# Altium PCB PCB2.PcbDoc (part 2 of 2)
Units mm, origin at the board's own origin, x right, y up, seen from the top; angles counter-clockwise.
Board outline 97.92 x 101.35 mm, 2 copper layers (Top Layer, Bottom Layer); 189 components, 25 nets, 488 pads, 0 vias.
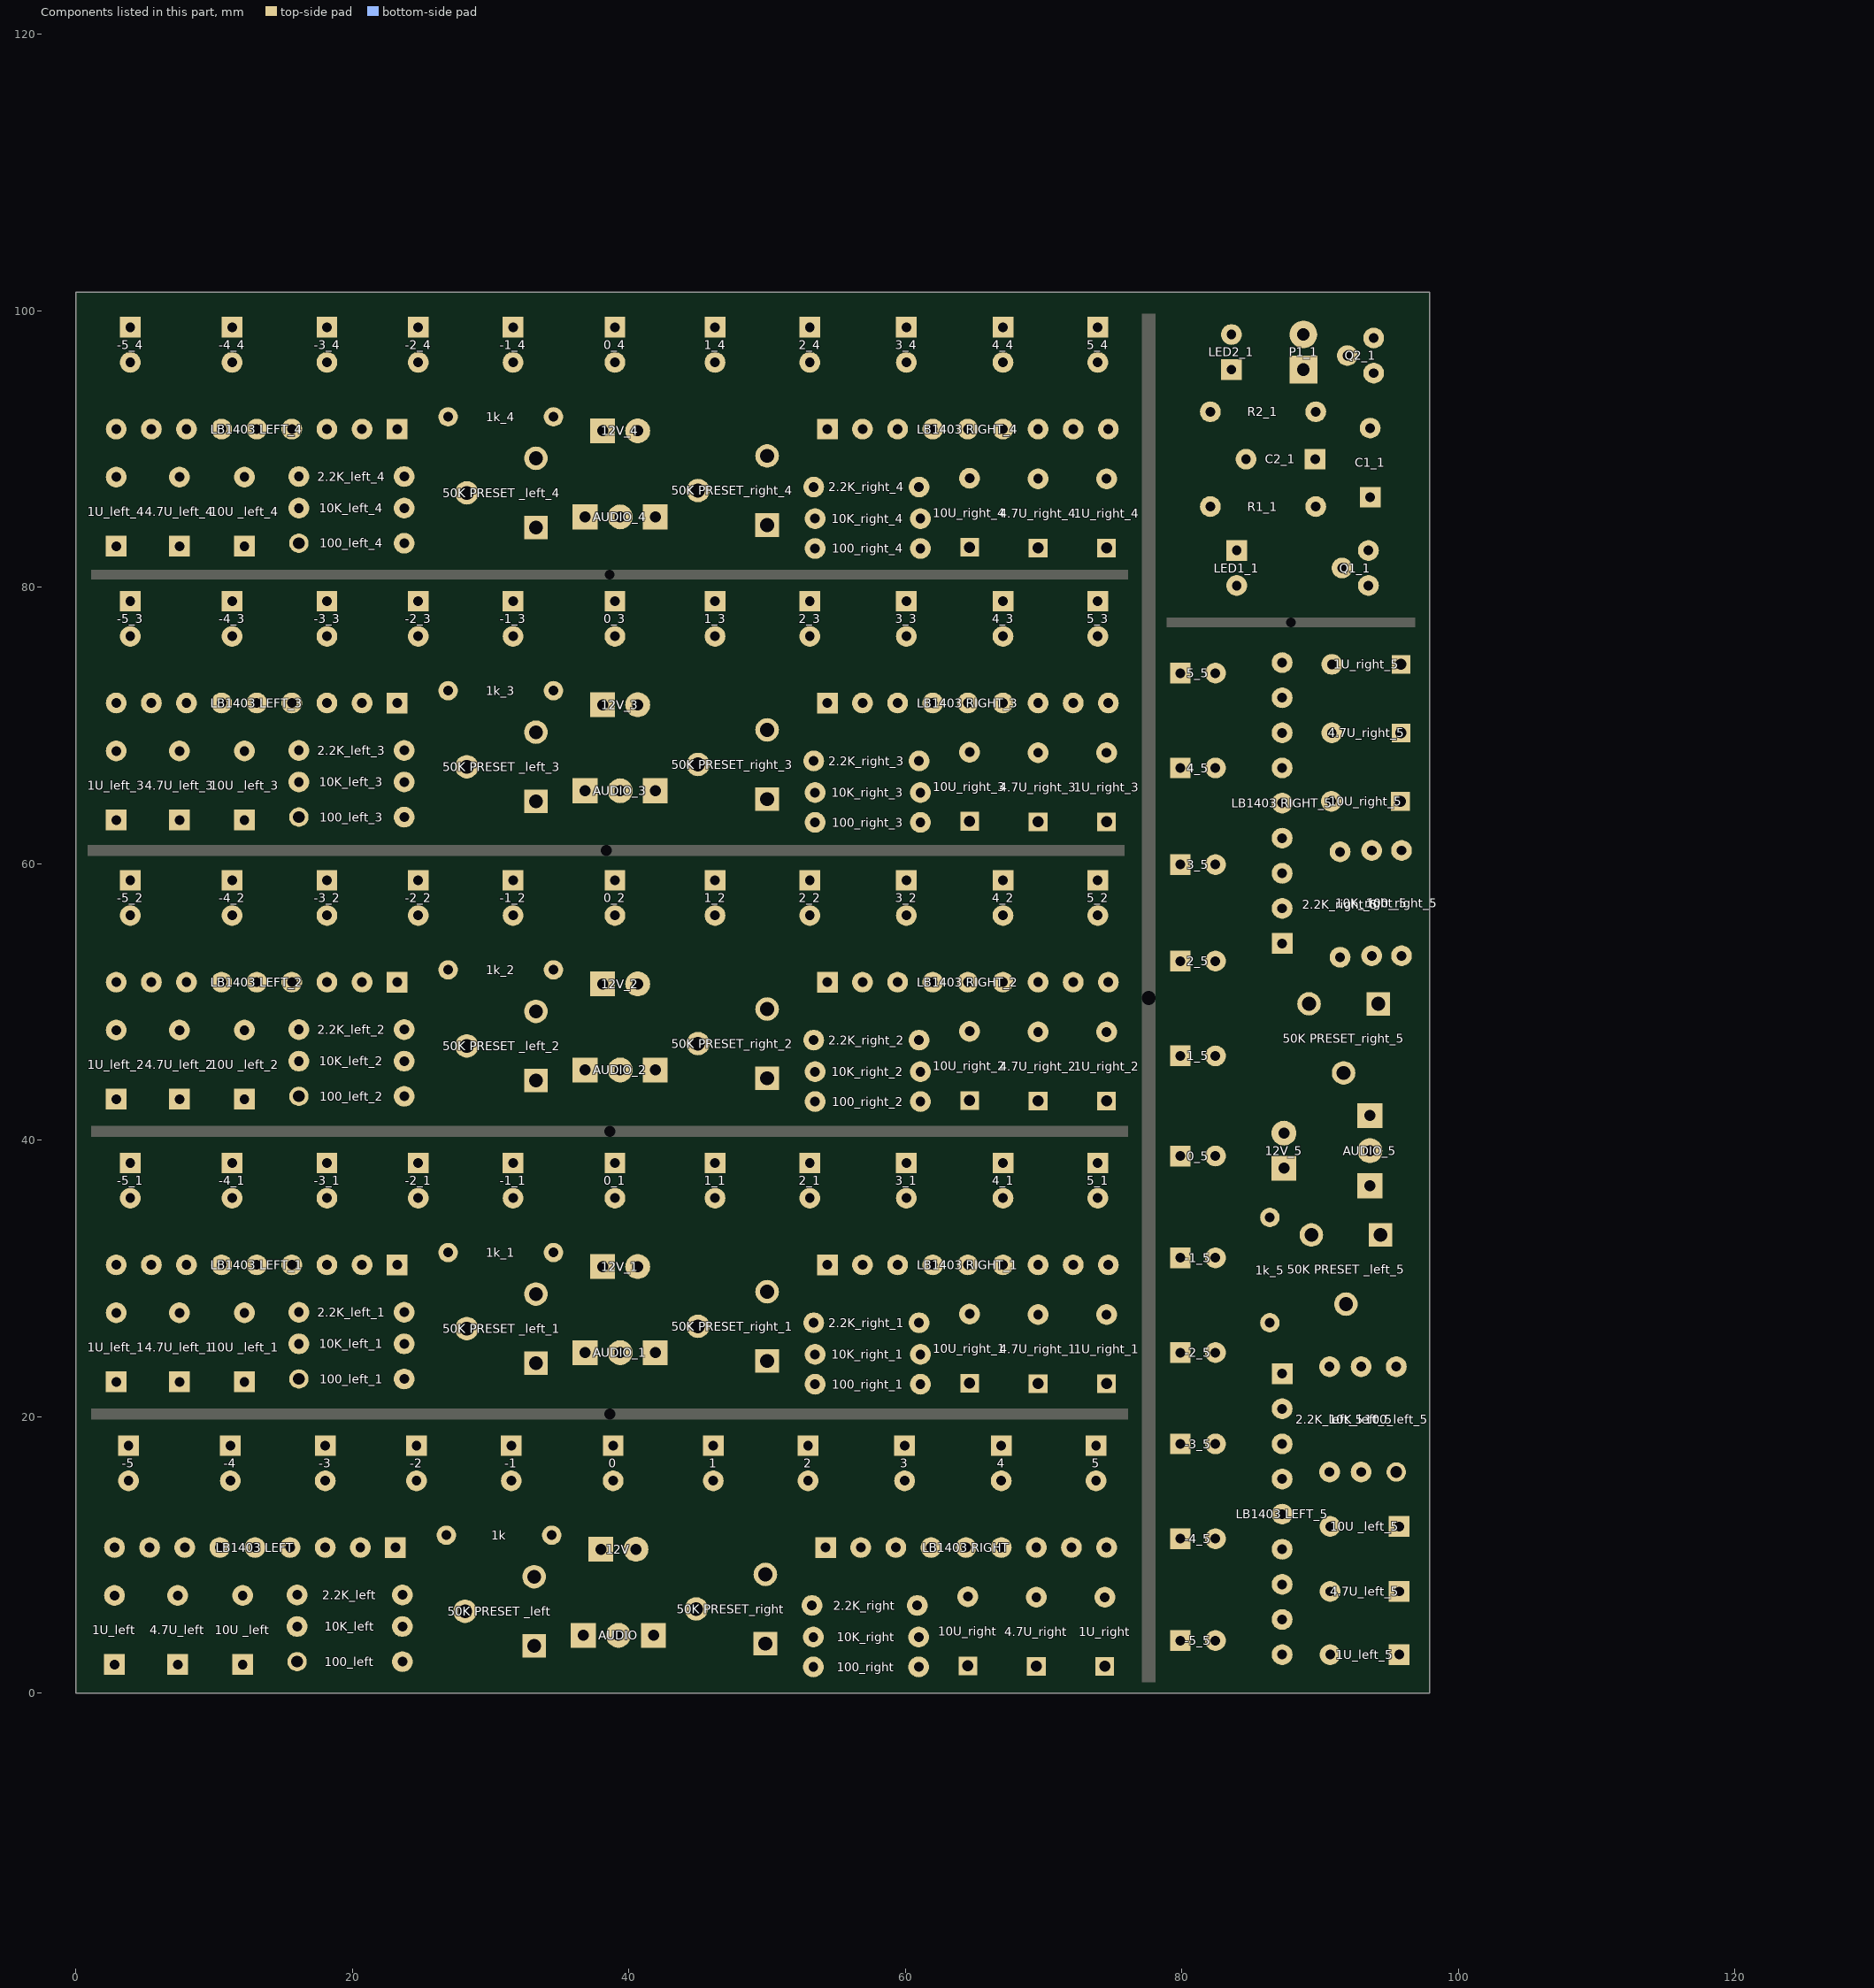
[diagram p2: the components of this part, seen from the top]

## Nets (pads, with @x,y where several pads share a name; then routed paths per layer and width w, separated by ;. In a path a pad name is that pad's centre, name@x,y a point inside that pad or via, vN(x,y) a via of type N, cw(c..) or ccw(c..) an arc to the next point about the centre after c; other vN are vias at no path point) (continued)
copper on no net: | length 3008.6
  Top Layer w0.508: 2.921,30.988 2.565,31.344 2.565,36.982 3.937,38.354 ; 2.921,51.435 2.565,51.791 2.565,57.429 3.937,58.801 ; 2.921,71.628 2.565,71.984 2.565,77.622 3.937,78.994 ; 2.921,91.44 2.565,91.796 2.565,97.434 3.937,98.806 ; 5.461,30.988 5.461,35.814 9.271,39.624 26.289,39.624 28.575,37.338 28.575,26.677 28.274,26.376 ; 5.461,51.435 5.461,56.261 9.271,60.071 26.289,60.071 28.575,57.785 28.575,47.124 28.274,46.823 ; 5.461,71.628 5.461,76.454 9.271,80.264 26.289,80.264 28.575,77.978 28.575,67.317 28.274,67.016 ; 5.461,91.44 5.461,96.266 9.271,100.076 26.289,100.076 28.575,97.79 28.575,87.129 28.274,86.828 ; 7.493,22.519 8.865,23.891 8.865,30.124 8.001,30.988 ; 7.493,42.966 8.865,44.338 8.865,50.571 8.001,51.435 ; 7.493,63.159 8.865,64.531 8.865,70.764 8.001,71.628 ; 7.493,82.971 8.865,84.343 8.865,90.576 8.001,91.44 ; 11.303,38.354 12.573,37.084 12.573,34.163 11.811,33.401 11.811,29.693 10.922,28.804 10.922,23.789 12.192,22.519 ; 11.303,58.801 12.573,57.531 12.573,54.61 11.811,53.848 11.811,50.14 10.922,49.251 10.922,44.236 12.192,42.966 ; 11.303,78.994 12.573,77.724 12.573,74.803 11.811,74.041 11.811,70.333 10.922,69.444 10.922,64.429 12.192,63.159 ; 11.303,98.806 12.573,97.536 12.573,94.615 11.811,93.853 11.811,90.145 10.922,89.256 10.922,84.241 12.192,82.971 ; 12.192,27.519 13.081,28.408 13.081,30.988 ; 12.192,47.966 13.081,48.855 13.081,51.435 ; 12.192,68.159 13.081,69.048 13.081,71.628 ; 12.192,87.971 13.081,88.86 13.081,91.44 ; 18.161,30.988 18.161,35.814 ; 18.161,51.435 18.161,56.261 ; 18.161,71.628 18.161,76.454 ; 18.161,91.44 18.161,96.266 ; 20.701,30.988 20.701,31.75 24.765,35.814 ; 20.701,51.435 20.701,52.197 24.765,56.261 ; 20.701,71.628 20.701,72.39 24.765,76.454 ; 20.701,91.44 20.701,92.202 24.765,96.266 ; 23.749,22.733 24.409,22.073 33.909,22.073 34.671,22.835 34.671,27.432 35.408,28.169 ; 23.749,27.559 26.314,24.994 29.392,24.994 33.274,28.876 ; 23.749,43.18 24.409,42.52 33.909,42.52 34.671,43.282 34.671,47.879 35.408,48.616 ; 23.749,48.006 26.314,45.441 29.392,45.441 33.274,49.323 ; 23.749,63.373 24.409,62.713 33.909,62.713 34.671,63.475 34.671,68.072 35.408,68.809 ; 23.749,68.199 26.314,65.634 29.392,65.634 33.274,69.516 ; 23.749,83.185 24.409,82.525 33.909,82.525 34.671,83.287 34.671,87.884 35.408,88.621 ; 23.749,88.011 26.314,85.446 29.392,85.446 33.274,89.328 ; 24.765,38.354 26.924,36.195 26.924,31.877 ; 24.765,58.801 26.924,56.642 26.924,52.324 ; 24.765,78.994 26.924,76.835 26.924,72.517 ; 24.765,98.806 26.924,96.647 26.924,92.329 ; 34.544,31.877 34.544,33.909 38.989,38.354 ; 34.544,52.324 34.544,54.356 38.989,58.801 ; 34.544,72.517 34.544,74.549 38.989,78.994 ; 34.544,92.329 34.544,94.361 38.989,98.806 ; 38.1,30.861 35.408,28.169 ; 38.1,51.308 35.408,48.616 ; 38.1,71.501 35.408,68.809 ; 38.1,91.313 35.408,88.621 ; 38.989,35.814 38.989,32.512 40.64,30.861 40.64,25.908 39.37,24.638 ; 38.989,56.261 38.989,52.959 40.64,51.308 40.64,46.355 39.37,45.085 ; 38.989,76.454 38.989,73.152 40.64,71.501 40.64,66.548 39.37,65.278 ; 38.989,96.266 38.989,92.964 40.64,91.313 40.64,86.36 39.37,85.09 ; 46.228,35.814 49.53,35.814 54.356,30.988 ; 46.228,56.261 49.53,56.261 54.356,51.435 ; 46.228,76.454 49.53,76.454 54.356,71.628 ; 46.228,96.266 49.53,96.266 54.356,91.44 ; 53.086,35.814 56.896,32.004 56.896,30.988 ; 53.086,56.261 56.896,52.451 56.896,51.435 ; 53.086,76.454 56.896,72.644 56.896,71.628 ; 53.086,96.266 56.896,92.456 56.896,91.44 ; 53.467,22.352 36.449,22.352 35.408,23.393 35.408,28.169 ; 53.467,42.799 36.449,42.799 35.408,43.84 35.408,48.616 ; 53.467,62.992 36.449,62.992 35.408,64.033 35.408,68.809 ; 53.467,82.804 36.449,82.804 35.408,83.845 35.408,88.621 ; 59.436,30.988 59.436,35.179 60.071,35.814 ; 59.436,51.435 59.436,55.626 60.071,56.261 ; 59.436,71.628 59.436,75.819 60.071,76.454 ; 59.436,91.44 59.436,95.631 60.071,96.266 ; 60.071,38.354 61.341,37.084 61.341,32.766 60.706,32.131 60.706,28.905 59.715,27.915 59.715,23.724 61.087,22.352 ; 60.071,58.801 61.341,57.531 61.341,53.213 60.706,52.578 60.706,49.352 59.715,48.362 59.715,44.171 61.087,42.799 ; 60.071,78.994 61.341,77.724 61.341,73.406 60.706,72.771 60.706,69.545 59.715,68.555 59.715,64.364 61.087,62.992 ; 60.071,98.806 61.341,97.536 61.341,93.218 60.706,92.583 60.706,89.357 59.715,88.367 59.715,84.176 61.087,82.804 ; 61.976,30.988 62.611,31.623 62.865,31.623 67.056,35.814 ; 61.976,51.435 62.611,52.07 62.865,52.07 67.056,56.261 ; 61.976,71.628 62.611,72.263 62.865,72.263 67.056,76.454 ; 61.976,91.44 62.611,92.075 62.865,92.075 67.056,96.266 ; 64.516,30.988 64.516,29.261 64.643,29.134 64.643,27.432 ; 64.516,51.435 64.516,49.708 64.643,49.581 64.643,47.879 ; 64.516,71.628 64.516,69.901 64.643,69.774 64.643,68.072 ; 64.516,91.44 64.516,89.713 64.643,89.586 64.643,87.884 ; 69.596,22.392 70.866,23.662 70.866,29.718 69.596,30.988 ; 69.596,42.839 70.866,44.109 70.866,50.165 69.596,51.435 ; 69.596,63.032 70.866,64.302 70.866,70.358 69.596,71.628 ; 69.596,82.844 70.866,84.114 70.866,90.17 69.596,91.44 ; 73.914,38.354 72.542,36.982 72.542,33.122 74.676,30.988 ; 73.914,58.801 72.542,57.429 72.542,53.569 74.676,51.435 ; 73.914,78.994 72.542,77.622 72.542,73.762 74.676,71.628 ; 73.914,98.806 72.542,97.434 72.542,93.574 74.676,91.44 ; 79.883,3.81 81.255,2.438 86.893,2.438 87.249,2.794 ; 79.883,11.176 81.153,12.446 84.074,12.446 84.836,11.684 88.544,11.684 89.433,10.795 94.448,10.795 95.718,12.065 ; 79.883,24.638 82.042,26.797 86.36,26.797 ; 79.883,38.862 84.328,34.417 86.36,34.417 ; 79.883,59.944 81.153,61.214 85.471,61.214 86.106,60.579 89.332,60.579 90.322,59.588 94.513,59.588 95.885,60.96 ; 79.883,73.787 81.255,72.415 85.115,72.415 87.249,74.549 ; 82.423,18.034 87.249,18.034 ; 82.423,24.638 86.487,20.574 87.249,20.574 ; 82.423,38.862 85.725,38.862 87.376,40.513 92.329,40.513 93.599,39.243 ; 82.423,46.101 82.423,49.403 87.249,54.229 ; 82.423,52.959 86.233,56.769 87.249,56.769 ; 82.423,59.944 83.058,59.309 87.249,59.309 ; 82.423,66.929 86.614,62.738 86.614,62.484 87.249,61.849 ; 87.249,5.334 82.423,5.334 78.613,9.144 78.613,26.162 80.899,28.448 91.56,28.448 91.861,28.147 ; 87.249,7.874 88.113,8.738 94.346,8.738 95.718,7.366 ; 87.249,12.954 89.829,12.954 90.718,12.065 ; 87.249,64.389 88.976,64.389 89.103,64.516 90.805,64.516 ; 87.249,69.469 88.519,70.739 94.575,70.739 95.845,69.469 ; 87.376,37.973 90.068,35.281 ; 89.361,33.147 93.243,29.265 93.243,26.187 90.678,23.622 ; 95.504,23.622 96.164,24.282 96.164,33.782 95.402,34.544 90.805,34.544 90.068,35.281 ; 95.885,53.34 95.885,36.322 94.844,35.281 90.068,35.281
  Top Layer w0.762: 89.638,89.265 89.638,90.114 93.869,94.345 93.869,95.488 ; 93.488,82.661 93.488,83.804 95.647,85.963 95.647,96.25 93.869,98.028
  Bottom Layer w0.508: 2.921,22.519 5.904,25.502 14.072,25.502 16.129,27.559 ; 2.921,27.519 4.981,29.579 30.467,29.579 35.408,24.638 36.83,24.638 ; 2.921,42.966 5.904,45.949 14.072,45.949 16.129,48.006 ; 2.921,47.966 4.981,50.026 30.467,50.026 35.408,45.085 36.83,45.085 ; 2.921,63.159 5.904,66.142 14.072,66.142 16.129,68.199 ; 2.921,68.159 4.981,70.219 30.467,70.219 35.408,65.278 36.83,65.278 ; 2.921,82.971 5.904,85.954 14.072,85.954 16.129,88.011 ; 2.921,87.971 4.981,90.031 30.467,90.031 35.408,85.09 36.83,85.09 ; 3.937,35.814 5.715,35.814 10.541,30.988 ; 3.937,38.354 11.303,38.354 18.161,38.354 24.765,38.354 31.623,38.354 ; 3.937,56.261 5.715,56.261 10.541,51.435 ; 3.937,58.801 11.303,58.801 18.161,58.801 24.765,58.801 31.623,58.801 ; 3.937,76.454 5.715,76.454 10.541,71.628 ; 3.937,78.994 11.303,78.994 18.161,78.994 24.765,78.994 31.623,78.994 ; 3.937,96.266 5.715,96.266 10.541,91.44 ; 3.937,98.806 11.303,98.806 18.161,98.806 24.765,98.806 31.623,98.806 ; 7.493,22.519 8.875,23.901 14.757,23.901 16.129,25.273 ; 7.493,27.519 12.192,27.519 13.49,28.817 20.205,28.817 23.749,25.273 26.314,27.838 29.312,27.838 33.274,23.876 34.315,23.876 34.976,23.216 37.948,23.216 39.37,24.638 40.792,23.216 43.764,23.216 44.592,24.043 49.998,24.043 51.486,24.043 51.954,24.511 53.467,24.511 57.023,28.067 64.008,28.067 64.643,27.432 67.081,27.432 67.121,27.392 69.596,27.392 ; 7.493,42.966 8.875,44.348 14.757,44.348 16.129,45.72 ; 7.493,47.966 12.192,47.966 13.49,49.264 20.205,49.264 23.749,45.72 26.314,48.285 29.312,48.285 33.274,44.323 34.315,44.323 34.976,43.663 37.948,43.663 39.37,45.085 40.792,43.663 43.764,43.663 44.592,44.49 49.998,44.49 51.486,44.49 51.954,44.958 53.467,44.958 57.023,48.514 64.008,48.514 64.643,47.879 67.081,47.879 67.121,47.839 69.596,47.839 ; 7.493,63.159 8.875,64.541 14.757,64.541 16.129,65.913 ; 7.493,68.159 12.192,68.159 13.49,69.457 20.205,69.457 23.749,65.913 26.314,68.478 29.312,68.478 33.274,64.516 34.315,64.516 34.976,63.856 37.948,63.856 39.37,65.278 40.792,63.856 43.764,63.856 44.592,64.683 49.998,64.683 51.486,64.683 51.954,65.151 53.467,65.151 57.023,68.707 64.008,68.707 64.643,68.072 67.081,68.072 67.121,68.032 69.596,68.032 ; 7.493,82.971 8.875,84.353 14.757,84.353 16.129,85.725 ; 7.493,87.971 12.192,87.971 13.49,89.269 20.205,89.269 23.749,85.725 26.314,88.29 29.312,88.29 33.274,84.328 34.315,84.328 34.976,83.668 37.948,83.668 39.37,85.09 40.792,83.668 43.764,83.668 44.592,84.495 49.998,84.495 51.486,84.495 51.954,84.963 53.467,84.963 57.023,88.519 64.008,88.519 64.643,87.884 67.081,87.884 67.121,87.844 69.596,87.844 ; 11.303,35.814 11.303,34.646 12.065,33.884 12.725,33.884 15.621,30.988 ; 11.303,56.261 11.303,55.093 12.065,54.331 12.725,54.331 15.621,51.435 ; 11.303,76.454 11.303,75.286 12.065,74.524 12.725,74.524 15.621,71.628 ; 11.303,96.266 11.303,95.098 12.065,94.336 12.725,94.336 15.621,91.44 ; 12.192,22.519 15.915,22.519 16.129,22.733 ; 12.192,42.966 15.915,42.966 16.129,43.18 ; 12.192,63.159 15.915,63.159 16.129,63.373 ; 12.192,82.971 15.915,82.971 16.129,83.185 ; 23.241,30.988 28.067,35.814 31.623,35.814 ; 23.241,51.435 28.067,56.261 31.623,56.261 ; 23.241,71.628 28.067,76.454 31.623,76.454 ; 23.241,91.44 28.067,96.266 31.623,96.266 ; 41.91,24.638 43.002,24.638 43.358,24.994 46.457,24.994 47.498,26.035 47.498,29.947 48.666,31.115 50.851,31.115 53.086,28.88 73.061,28.88 74.549,27.392 ; 41.91,45.085 43.002,45.085 43.358,45.441 46.457,45.441 47.498,46.482 47.498,50.394 48.666,51.562 50.851,51.562 53.086,49.327 73.061,49.327 74.549,47.839 ; 41.91,65.278 43.002,65.278 43.358,65.634 46.457,65.634 47.498,66.675 47.498,70.587 48.666,71.755 50.851,71.755 53.086,69.52 73.061,69.52 74.549,68.032 ; 41.91,85.09 43.002,85.09 43.358,85.446 46.457,85.446 47.498,86.487 47.498,90.399 48.666,91.567 50.851,91.567 53.086,89.332 73.061,89.332 74.549,87.844 ; 44.998,26.543 44.998,30.353 47.335,32.69 70.434,32.69 72.136,30.988 ; 44.998,46.99 44.998,50.8 47.335,53.137 70.434,53.137 72.136,51.435 ; 44.998,67.183 44.998,70.993 47.335,73.33 70.434,73.33 72.136,71.628 ; 44.998,86.995 44.998,90.805 47.335,93.142 70.434,93.142 72.136,91.44 ; 46.228,38.354 53.086,38.354 60.071,38.354 67.056,38.354 73.914,38.354 ; 46.228,58.801 53.086,58.801 60.071,58.801 67.056,58.801 73.914,58.801 ; 46.228,78.994 53.086,78.994 60.071,78.994 67.056,78.994 73.914,78.994 ; 46.228,98.806 53.086,98.806 60.071,98.806 67.056,98.806 73.914,98.806 ; 49.998,29.043 52.244,26.797 53.365,26.797 ; 49.998,49.49 52.244,47.244 53.365,47.244 ; 49.998,69.683 52.244,67.437 53.365,67.437 ; 49.998,89.495 52.244,87.249 53.365,87.249 ; 60.985,26.797 62.408,25.375 71.566,25.375 74.549,22.392 ; 60.985,47.244 62.408,45.822 71.566,45.822 74.549,42.839 ; 60.985,67.437 62.408,66.015 71.566,66.015 74.549,63.032 ; 60.985,87.249 62.408,85.827 71.566,85.827 74.549,82.844 ; 61.087,22.352 62.814,22.352 62.894,22.432 64.643,22.432 ; 61.087,24.511 67.477,24.511 69.596,22.392 ; 61.087,42.799 62.814,42.799 62.894,42.879 64.643,42.879 ; 61.087,44.958 67.477,44.958 69.596,42.839 ; 61.087,62.992 62.814,62.992 62.894,63.072 64.643,63.072 ; 61.087,65.151 67.477,65.151 69.596,63.032 ; 61.087,82.804 62.814,82.804 62.894,82.884 64.643,82.884 ; 61.087,84.963 67.477,84.963 69.596,82.844 ; 67.056,30.988 68.326,29.718 73.025,29.718 73.406,30.099 73.406,35.814 73.914,35.814 ; 67.056,51.435 68.326,50.165 73.025,50.165 73.406,50.546 73.406,56.261 73.914,56.261 ; 67.056,71.628 68.326,70.358 73.025,70.358 73.406,70.739 73.406,76.454 73.914,76.454 ; 67.056,91.44 68.326,90.17 73.025,90.17 73.406,90.551 73.406,96.266 73.914,96.266 ; 79.883,3.81 79.883,11.176 79.883,18.034 79.883,24.638 79.883,31.496 ; 79.883,46.101 79.883,52.959 79.883,59.944 79.883,66.929 79.883,73.787 ; 82.423,3.81 82.423,5.588 87.249,10.414 ; 82.423,11.176 83.591,11.176 84.353,11.938 84.353,12.598 87.249,15.494 ; 82.423,31.496 82.423,27.94 87.249,23.114 ; 82.423,73.787 82.423,73.279 88.138,73.279 88.519,72.898 88.519,68.199 87.249,66.929 ; 87.249,72.009 85.547,70.307 85.547,47.208 87.884,44.871 91.694,44.871 ; 89.194,49.871 91.44,52.117 91.44,53.238 ; 90.678,16.002 92.735,13.945 92.735,5.777 95.718,2.794 ; 90.718,2.794 88.658,4.854 88.658,30.34 93.599,35.281 93.599,36.703 ; 90.718,7.366 90.718,12.065 89.42,13.363 89.42,20.078 92.964,23.622 90.399,26.187 90.399,29.185 94.361,33.147 94.361,34.188 95.021,34.849 95.021,37.821 93.599,39.243 95.021,40.665 95.021,43.637 94.194,44.465 94.194,49.871 94.194,51.359 93.726,51.827 93.726,53.34 90.17,56.896 90.17,63.881 90.805,64.516 90.805,66.954 90.845,66.994 90.845,69.469 ; 90.845,74.422 89.357,72.934 89.357,52.959 87.122,50.724 87.122,48.539 88.29,47.371 92.202,47.371 93.243,46.33 93.243,43.231 93.599,42.875 93.599,41.783 ; 91.44,60.858 92.862,62.281 92.862,71.439 95.845,74.422 ; 92.964,16.002 94.336,14.63 94.336,8.748 95.718,7.366 ; 93.726,60.96 93.726,67.35 95.845,69.469 ; 95.504,16.002 95.718,15.788 95.718,12.065 ; 95.805,64.516 95.805,62.767 95.885,62.687 95.885,60.96
  Bottom Layer w0.762: 83.582,98.282 85.741,98.282 87.519,100.06 95.139,100.06 95.901,99.298 95.901,97.52 93.869,95.488 ; 83.963,80.121 88.916,80.121 89.805,79.232 92.599,79.232 93.488,80.121 95.012,81.645 95.012,85.328 93.829,86.511 93.615,86.511 ; 83.963,82.661 83.963,83.931 82.058,85.836 82.058,92.694 82.058,94.218 83.582,95.742 88.789,95.742 ; 84.638,89.265 86.249,89.265 89.678,85.836 91.583,83.931 91.583,81.391 ; 88.789,98.282 93.615,98.282 93.869,98.028 ; 91.964,96.758 91.964,95.107 89.678,92.821 89.678,92.694 90.861,91.511 93.615,91.511

## Keep-outs
Keep-Out Layer:
  the board outline again, w0.254

## Silkscreen, mask and mechanical layers (free items; w line width, h text height)
Top Overlay:
  lines w0.254: 0.508,0.508 76.708,0.508 76.708,19.304 0.508,19.304 0.508,0.508 ; 0.635,20.955 0.635,39.751 76.835,39.751 76.835,20.955 0.635,20.955 ; 0.635,41.402 0.635,60.198 76.835,60.198 76.835,41.402 0.635,41.402 ; 0.635,61.595 0.635,80.391 76.835,80.391 76.835,61.595 0.635,61.595 ; 0.635,81.407 0.635,100.203 76.835,100.203 76.835,81.407 0.635,81.407 ; 1.016,8.509 1.016,13.335 1.016,13.716 22.352,13.716 22.987,13.081 25.527,10.541 25.527,8.509 1.016,8.509 ; 1.143,28.956 25.654,28.956 25.654,30.988 23.114,33.528 22.479,34.163 1.143,34.163 1.143,33.782 1.143,28.956 ; 1.143,49.403 25.654,49.403 25.654,51.435 23.114,53.975 22.479,54.61 1.143,54.61 1.143,54.229 1.143,49.403 ; 1.143,69.596 25.654,69.596 25.654,71.628 23.114,74.168 22.479,74.803 1.143,74.803 1.143,74.422 1.143,69.596 ; 1.143,89.408 25.654,89.408 25.654,91.44 23.114,93.98 22.479,94.615 1.143,94.615 1.143,94.234 1.143,89.408 ; 51.816,8.382 51.816,11.303 54.356,13.843 76.327,13.843 76.327,8.382 76.2,8.382 75.946,8.382 51.816,8.382 ; 51.943,28.829 76.073,28.829 76.327,28.829 76.454,28.829 76.454,34.29 54.483,34.29 51.943,31.75 51.943,28.829 ; 51.943,49.276 76.073,49.276 76.327,49.276 76.454,49.276 76.454,54.737 54.483,54.737 51.943,52.197 51.943,49.276 ; 51.943,69.469 76.073,69.469 76.327,69.469 76.454,69.469 76.454,74.93 54.483,74.93 51.943,72.39 51.943,69.469 ; 51.943,89.281 76.073,89.281 76.327,89.281 76.454,89.281 76.454,94.742 54.483,94.742 51.943,92.202 51.943,89.281 ; 78.486,0.508 97.282,0.508 97.282,76.708 78.486,76.708 78.486,0.508 ; 78.502,78.232 96.917,78.232 96.917,100.584 78.502,100.584 78.502,78.232 ; 83.947,54.356 86.487,51.816 89.408,51.816 89.408,75.946 89.408,76.2 89.408,76.327 83.947,76.327 83.947,54.356 ; 84.074,1.016 84.455,1.016 89.281,1.016 89.281,25.527 87.249,25.527 84.709,22.987 84.074,22.352 84.074,1.016
  text "3V" at 91.456,98.663 h1 r90
  text "-" at 87.646,98.282 h1 r90
  text "-" at 82.566,97.901 h1 r90
  text "+" at 9.271,97.79 h1.52
  text "+" at 16.129,97.79 h1.52
  text "+" at 22.733,97.79 h1.52
  text "+" at 29.591,97.79 h1.52
  text "+" at 36.957,97.79 h1.52
  text "+" at 44.069,97.79 h1.52
  text "+" at 51.054,97.79 h1.52
  text "+" at 58.039,97.79 h1.52
  text "+" at 65.024,97.79 h1.52
  text "+" at 71.882,97.79 h1.52
  text "+" at 1.778,97.663 h1.52
  text "LED" at 80.153,95.996 h1 r90
  text "-" at 1.905,95.758 h1.52
  text "-" at 9.271,95.758 h1.52
  text "-" at 16.129,95.758 h1.52
  text "-" at 22.733,95.758 h1.52
  text "-" at 29.591,95.758 h1.52
  text "-" at 36.957,95.758 h1.52
  text "-" at 44.196,95.758 h1.52
  text "-" at 51.054,95.758 h1.52
  text "-" at 58.039,95.758 h1.52
  text "-" at 65.024,95.758 h1.52
  text "-" at 71.882,95.758 h1.52
  text "+" at 82.439,95.488 h1 r90
  text "+" at 87.392,94.599 h1 r90
  text "2N2222" at 96.536,93.71 h1 r90
  text "33K" at 86.63,93.202 h1 r180
  text "LB1403" at 61.722,93.091 h1.3
  text "LB1403" at 8.128,92.964 h1.3
  text "POWER" at 37.084,92.964 h1
  text "12V" at 42.291,92.964 h1.52
  text "1K" at 30.099,91.821 h1
  text "-" at 42.291,90.678 h1.52
  text "+" at 35.433,90.424 h1.52
  text "-" at 94.123,89.646 h1 r90
  text "+" at 88.789,89.011 h1 r90
  text "-" at 86.122,88.757 h1 r90
  text "100U" at 87.519,87.868 h0.8 r90
  text "100U" at 93.234,87.741 h0.8 r90
  text "+" at 94.123,87.741 h1 r90
  text "2.2K" at 18.161,87.503 h1
  text "-" at 0.889,87.122 h1.52
  text "-" at 5.334,86.995 h1.52
  text "-" at 10.16,86.995 h1.52
  text "-" at 62.611,86.995 h1.52
  text "-" at 67.564,86.995 h1.52
  text "-" at 72.644,86.995 h1.52
  text "AUDIO" at 36.83,86.741 h1.2
  text "2.2K" at 55.397,86.741 h1
  text "33K" at 87.011,86.344 h1 r180
  text "50K" at 29.464,86.106 h1.5
  text "50K" at 46.482,86.106 h1.5
  text "A.I. PCB" at 80.407,85.963 h1 r90
  text "10K" at 18.542,85.217 h1
  text "10u" at 11.049,85.09 h1
  text "4.7u" at 5.715,84.963 h1
  text "1u" at 1.905,84.709 h1.5
  text "10u" at 63.373,84.709 h1
  text "4.7u" at 67.818,84.709 h1
  text "1u" at 73.533,84.709 h1.5
  text "10K" at 56.007,84.455 h1
  text "100" at 18.669,82.677 h1
  text "GND" at 38.1,82.423 h1
  text "100" at 56.007,82.296 h1
  text "+" at 82.947,82.28 h1 r90
  text "+" at 0.889,82.169 h1.52
  text "+" at 5.461,82.169 h1.52
  text "+" at 10.033,82.169 h1.52
  text "+" at 62.611,82.042 h1.52
  text "+" at 67.564,82.042 h1.52
  text "+" at 72.517,82.042 h1.52
  text "AI PCB" at 25.146,81.788 h1.5
  text "L" at 36.195,81.788 h1.8
  text "VU" at 44.196,81.788 h1.5
  text "R" at 41.529,81.661 h1.8
  text "METER" at 47.117,81.661 h0.9
  text "-" at 83.074,80.502 h1 r90
  text "LED" at 80.534,79.867 h1 r90
  text "2N2222" at 96.536,78.47 h1 r90
  text "+" at 9.271,77.978 h1.52
  text "+" at 16.129,77.978 h1.52
  text "+" at 22.733,77.978 h1.52
  text "+" at 29.591,77.978 h1.52
  text "+" at 36.957,77.978 h1.52
  text "+" at 44.069,77.978 h1.52
  text "+" at 51.054,77.978 h1.52
  text "+" at 58.039,77.978 h1.52
  text "+" at 65.024,77.978 h1.52
  text "+" at 71.882,77.978 h1.52
  text "+" at 1.778,77.851 h1.52
  text "-" at 1.905,75.946 h1.52
  text "-" at 9.271,75.946 h1.52
  text "-" at 16.129,75.946 h1.52
  text "-" at 22.733,75.946 h1.52
  text "-" at 29.591,75.946 h1.52
  text "-" at 36.957,75.946 h1.52
  text "-" at 44.196,75.946 h1.52
  text "-" at 51.054,75.946 h1.52
  text "-" at 58.039,75.946 h1.52
  text "-" at 65.024,75.946 h1.52
  text "-" at 71.882,75.946 h1.52
  text "1u" at 93.98,73.406 h1.5 r90
  text "LB1403" at 61.722,73.279 h1.3
  text "LB1403" at 8.128,73.152 h1.3
  text "POWER" at 37.084,73.152 h1
  text "12V" at 42.291,73.152 h1.52
  text "-" at 91.694,72.517 h1.52 r90
  text "+" at 96.647,72.39 h1.52 r90
  text "1K" at 30.099,72.009 h1
  text "+" at 80.899,71.755 h1.52 r90
  text "-" at 82.931,71.755 h1.52 r90
  text "-" at 42.291,70.866 h1.52
  text "+" at 35.433,70.612 h1.52
  text "2.2K" at 18.161,67.691 h1
  text "4.7u" at 93.98,67.691 h1 r90
  text "-" at 91.694,67.437 h1.52 r90
  text "+" at 96.647,67.437 h1.52 r90
  text "-" at 0.889,67.31 h1.52
  text "-" at 5.334,67.183 h1.52
  text "-" at 10.16,67.183 h1.52
  text "-" at 62.611,67.183 h1.52
  text "-" at 67.564,67.183 h1.52
  text "-" at 72.644,67.183 h1.52
  text "AUDIO" at 36.83,66.929 h1.2
  text "2.2K" at 55.397,66.929 h1
  text "50K" at 29.464,66.294 h1.5
  text "50K" at 46.482,66.294 h1.5
  text "10K" at 18.542,65.405 h1
  text "10u" at 11.049,65.278 h1
  text "4.7u" at 5.715,65.151 h1
  text "1u" at 1.905,64.897 h1.5
  text "10u" at 63.373,64.897 h1
  text "4.7u" at 67.818,64.897 h1
  text "1u" at 73.533,64.897 h1.5
  text "+" at 80.899,64.897 h1.52 r90
  text "-" at 82.931,64.897 h1.52 r90
  text "10K" at 56.007,64.643 h1
  text "10u" at 93.98,63.246 h1 r90
  text "100" at 18.669,62.865 h1
  text "GND" at 38.1,62.611 h1
  text "100" at 56.007,62.484 h1
  text "-" at 91.694,62.484 h1.52 r90
  text "+" at 96.647,62.484 h1.52 r90
  text "+" at 0.889,62.357 h1.52
  text "+" at 5.461,62.357 h1.52
  text "+" at 10.033,62.357 h1.52
  text "+" at 62.611,62.23 h1.52
  text "+" at 67.564,62.23 h1.52
  text "+" at 72.517,62.23 h1.52
  text "AI PCB" at 25.146,61.976 h1.5
  text "L" at 36.195,61.976 h1.8
  text "VU" at 44.196,61.976 h1.5
  text "R" at 41.529,61.849 h1.8
  text "METER" at 47.117,61.849 h0.9
  text "LB1403" at 85.598,61.595 h1.3 r90
  text "+" at 80.899,57.912 h1.52 r90
  text "-" at 82.931,57.912 h1.52 r90
  text "+" at 9.271,57.785 h1.52
  text "+" at 16.129,57.785 h1.52
  text "+" at 22.733,57.785 h1.52
  text "+" at 29.591,57.785 h1.52
  text "+" at 36.957,57.785 h1.52
  text "+" at 44.069,57.785 h1.52
  text "+" at 51.054,57.785 h1.52
  text "+" at 58.039,57.785 h1.52
  text "+" at 65.024,57.785 h1.52
  text "+" at 71.882,57.785 h1.52
  text "+" at 1.778,57.658 h1.52
  text "10K" at 94.234,55.88 h1 r90
  text "100" at 96.393,55.88 h1 r90
  text "-" at 1.905,55.753 h1.52
  text "-" at 9.271,55.753 h1.52
  text "-" at 16.129,55.753 h1.52
  text "-" at 22.733,55.753 h1.52
  text "-" at 29.591,55.753 h1.52
  text "-" at 36.957,55.753 h1.52
  text "-" at 44.196,55.753 h1.52
  text "-" at 51.054,55.753 h1.52
  text "-" at 58.039,55.753 h1.52
  text "-" at 65.024,55.753 h1.52
  text "-" at 71.882,55.753 h1.52
  text "2.2K" at 91.948,55.27 h1 r90
  text "LB1403" at 61.722,53.086 h1.3
  text "LB1403" at 8.128,52.959 h1.3
  text "POWER" at 37.084,52.959 h1
  text "12V" at 42.291,52.959 h1.52
  text "1K" at 30.099,51.816 h1
  text "+" at 80.899,50.927 h1.52 r90
  text "-" at 82.931,50.927 h1.52 r90
  text "-" at 42.291,50.673 h1.52
  text "+" at 35.433,50.419 h1.52
  text "2.2K" at 18.161,47.498 h1
  text "-" at 0.889,47.117 h1.52
  text "-" at 5.334,46.99 h1.52
  text "-" at 10.16,46.99 h1.52
  text "-" at 62.611,46.99 h1.52
  text "-" at 67.564,46.99 h1.52
  text "-" at 72.644,46.99 h1.52
  text "METER" at 97.028,46.99 h0.9 r90
  text "AUDIO" at 36.83,46.736 h1.2
  text "2.2K" at 55.397,46.736 h1
  text "50K" at 92.583,46.355 h1.5 r90
  text "50K" at 29.464,46.101 h1.5
  text "50K" at 46.482,46.101 h1.5
  text "10K" at 18.542,45.212 h1
  text "10u" at 11.049,45.085 h1
  text "4.7u" at 5.715,44.958 h1
  text "1u" at 1.905,44.704 h1.5
  text "10u" at 63.373,44.704 h1
  text "4.7u" at 67.818,44.704 h1
  text "1u" at 73.533,44.704 h1.5
  text "10K" at 56.007,44.45 h1
  text "-" at 82.931,44.069 h1.52 r90
  text "VU" at 96.901,44.069 h1.5 r90
  text "+" at 80.899,43.942 h1.52 r90
  text "100" at 18.669,42.672 h1
  text "GND" at 38.1,42.418 h1
  text "100" at 56.007,42.291 h1
  text "+" at 0.889,42.164 h1.52
  text "+" at 5.461,42.164 h1.52
  text "+" at 10.033,42.164 h1.52
  text "12V" at 85.725,42.164 h1.52 r90
  text "-" at 88.011,42.164 h1.52 r90
  text "+" at 62.611,42.037 h1.52
  text "+" at 67.564,42.037 h1.52
  text "+" at 72.517,42.037 h1.52
  text "AI PCB" at 25.146,41.783 h1.5
  text "L" at 36.195,41.783 h1.8
  text "VU" at 44.196,41.783 h1.5
  text "R" at 41.529,41.656 h1.8
  text "METER" at 47.117,41.656 h0.9
  text "R" at 97.028,41.402 h1.8 r90
  text "GND" at 96.266,37.973 h1 r90
  text "+" at 9.271,37.338 h1.52
  text "+" at 16.129,37.338 h1.52
  text "+" at 22.733,37.338 h1.52
  text "+" at 29.591,37.338 h1.52
  text "+" at 36.957,37.338 h1.52
  text "+" at 44.069,37.338 h1.52
  text "+" at 51.054,37.338 h1.52
  text "+" at 58.039,37.338 h1.52
  text "+" at 65.024,37.338 h1.52
  text "+" at 71.882,37.338 h1.52
  text "+" at 1.778,37.211 h1.52
  text "POWER" at 85.725,36.957 h1 r90
  text "+" at 80.899,36.83 h1.52 r90
  text "-" at 82.931,36.83 h1.52 r90
  text "AUDIO" at 91.948,36.703 h1.2 r90
  text "L" at 96.901,36.068 h1.8 r90
  text "-" at 1.905,35.306 h1.52
  text "-" at 9.271,35.306 h1.52
  text "-" at 16.129,35.306 h1.52
  text "-" at 22.733,35.306 h1.52
  text "-" at 29.591,35.306 h1.52
  text "-" at 36.957,35.306 h1.52
  text "-" at 44.196,35.306 h1.52
  text "-" at 51.054,35.306 h1.52
  text "-" at 58.039,35.306 h1.52
  text "-" at 65.024,35.306 h1.52
  text "-" at 71.882,35.306 h1.52
  text "+" at 88.265,35.306 h1.52 r90
  text "LB1403" at 61.722,32.639 h1.3
  text "LB1403" at 8.128,32.512 h1.3
  text "POWER" at 37.084,32.512 h1
  text "12V" at 42.291,32.512 h1.52
  text "1K" at 30.099,31.369 h1
  text "-" at 42.291,30.226 h1.52
  text "+" at 35.433,29.972 h1.52
  text "1K" at 86.868,29.972 h1 r90
  text "+" at 80.899,29.464 h1.52 r90
  text "-" at 82.931,29.464 h1.52 r90
  text "50K" at 92.583,29.337 h1.5 r90
  text "2.2K" at 18.161,27.051 h1
  text "-" at 0.889,26.67 h1.52
  text "-" at 5.334,26.543 h1.52
  text "-" at 10.16,26.543 h1.52
  text "-" at 62.611,26.543 h1.52
  text "-" at 67.564,26.543 h1.52
  text "-" at 72.644,26.543 h1.52
  text "AUDIO" at 36.83,26.289 h1.2
  text "2.2K" at 55.397,26.289 h1
  text "50K" at 29.464,25.654 h1.5
  text "50K" at 46.482,25.654 h1.5
  text "AI PCB" at 96.901,25.019 h1.5 r90
  text "10K" at 18.542,24.765 h1
  text "10u" at 11.049,24.638 h1
  text "4.7u" at 5.715,24.511 h1
  text "1u" at 1.905,24.257 h1.5
  text "10u" at 63.373,24.257 h1
  text "4.7u" at 67.818,24.257 h1
  text "1u" at 73.533,24.257 h1.5
  text "10K" at 56.007,24.003 h1
  text "+" at 80.899,22.606 h1.52 r90
  text "-" at 82.931,22.606 h1.52 r90
  text "100" at 18.669,22.225 h1
  text "GND" at 38.1,21.971 h1
  text "100" at 56.007,21.844 h1
  text "+" at 0.889,21.717 h1.52
  text "+" at 5.461,21.717 h1.52
  text "+" at 10.033,21.717 h1.52
  text "+" at 62.611,21.59 h1.52
  text "+" at 67.564,21.59 h1.52
  text "+" at 72.517,21.59 h1.52
  text "AI PCB" at 25.146,21.336 h1.5
  text "L" at 36.195,21.336 h1.8
  text "VU" at 44.196,21.336 h1.5
  text "R" at 41.529,21.209 h1.8
  text "METER" at 47.117,21.209 h0.9
  text "100" at 96.012,18.542 h1 r90
  text "10K" at 93.472,18.415 h1 r90
  text "2.2K" at 91.186,18.034 h1 r90
  text "+" at 9.144,16.891 h1.52
  text "+" at 16.002,16.891 h1.52
  text "+" at 22.606,16.891 h1.52
  text "+" at 29.464,16.891 h1.52
  text "+" at 36.83,16.891 h1.52
  text "+" at 43.942,16.891 h1.52
  text "+" at 50.927,16.891 h1.52
  text "+" at 57.912,16.891 h1.52
  text "+" at 64.897,16.891 h1.52
  text "+" at 71.755,16.891 h1.52
  text "+" at 1.651,16.764 h1.52
  text "+" at 80.899,16.002 h1.52 r90
  text "-" at 82.931,16.002 h1.52 r90
  text "-" at 1.778,14.859 h1.52
  text "-" at 9.144,14.859 h1.52
  text "-" at 16.002,14.859 h1.52
  text "-" at 22.606,14.859 h1.52
  text "-" at 29.464,14.859 h1.52
  text "-" at 36.83,14.859 h1.52
  text "-" at 44.069,14.859 h1.52
  text "-" at 50.927,14.859 h1.52
  text "-" at 57.912,14.859 h1.52
  text "-" at 64.897,14.859 h1.52
  text "-" at 71.755,14.859 h1.52
  text "LB1403" at 61.595,12.192 h1.3
  text "LB1403" at 8.001,12.065 h1.3
  text "POWER" at 36.957,12.065 h1
  text "12V" at 42.164,12.065 h1.52
  text "1K" at 29.972,10.922 h1
  text "10u" at 93.599,10.922 h1 r90
  text "-" at 91.694,10.033 h1.52 r90
  text "+" at 96.52,9.906 h1.52 r90
  text "-" at 42.164,9.779 h1.52
  text "+" at 35.306,9.525 h1.52
  text "+" at 80.899,9.144 h1.52 r90
  text "-" at 82.931,9.144 h1.52 r90
  text "LB1403" at 85.725,8.001 h1.3 r90
  text "2.2K" at 18.034,6.604 h1
  text "-" at 0.762,6.223 h1.52
  text "-" at 5.207,6.096 h1.52
  text "-" at 10.033,6.096 h1.52
  text "-" at 62.484,6.096 h1.52
  text "-" at 67.437,6.096 h1.52
  text "-" at 72.517,6.096 h1.52
  text "AUDIO" at 36.703,5.842 h1.2
  text "2.2K" at 55.27,5.842 h1
  text "4.7u" at 93.726,5.588 h1 r90
  text "+" at 96.52,5.334 h1.52 r90
  text "50K" at 29.337,5.207 h1.5
  text "50K" at 46.355,5.207 h1.5
  text "-" at 91.694,5.207 h1.52 r90
  text "10K" at 18.415,4.318 h1
  text "10u" at 10.922,4.191 h1
  text "4.7u" at 5.588,4.064 h1
  text "1u" at 1.778,3.81 h1.5
  text "10u" at 63.246,3.81 h1
  text "4.7u" at 67.691,3.81 h1
  text "1u" at 73.406,3.81 h1.5
  text "10K" at 55.88,3.556 h1
  text "100" at 18.542,1.778 h1
  text "-" at 82.931,1.778 h1.52 r90
  text "1u" at 93.98,1.778 h1.5 r90
  text "+" at 81.026,1.651 h1.52 r90
  text "GND" at 37.973,1.524 h1
  text "100" at 55.88,1.397 h1
  text "+" at 0.762,1.27 h1.52
  text "+" at 5.334,1.27 h1.52
  text "+" at 9.906,1.27 h1.52
  text "+" at 62.484,1.143 h1.52
  text "+" at 67.437,1.143 h1.52
  text "+" at 72.39,1.143 h1.52
  text "AI PCB" at 25.019,0.889 h1.5
  text "L" at 36.068,0.889 h1.8
  text "VU" at 44.069,0.889 h1.5
  text "R" at 41.402,0.762 h1.8
  text "METER" at 46.99,0.762 h0.9
  text "-" at 91.567,0.762 h1.52 r90
  text "+" at 96.52,0.762 h1.52 r90
Bottom Overlay:
  text "AI PCB" at 43.561,93.218 h1.52
  text "A.I. PCB" at 80.407,93.202 h1 r90
  text "VU METER" at 46.101,88.265 h1.5
  text "AI PCB" at 43.561,73.406 h1.52
  text "VU METER" at 46.101,68.326 h1.5
  text "AI PCB" at 43.561,53.467 h1.52
  text "VU METER" at 46.101,48.133 h1.5
  text "VU METER" at 90.424,46.482 h1.5 r90
  text "AI PCB" at 85.725,43.815 h1.52 r90
  text "AI PCB" at 43.434,32.766 h1.52
  text "VU METER" at 46.101,27.686 h1.5
  text "AI PCB" at 43.561,12.319 h1.52
  text "VU METER" at 46.228,7.239 h1.5